# Altium PCB PCB_CONTROL.PcbDoc (part 9 of 15)
Units mil, origin at the board's own origin, x right, y up, seen from the top; angles counter-clockwise.
Board outline 7360.03 x 4773.15 mil, 2 copper layers (Top Layer, Bottom Layer); 73 components, 135 nets, 396 pads, 106 vias.
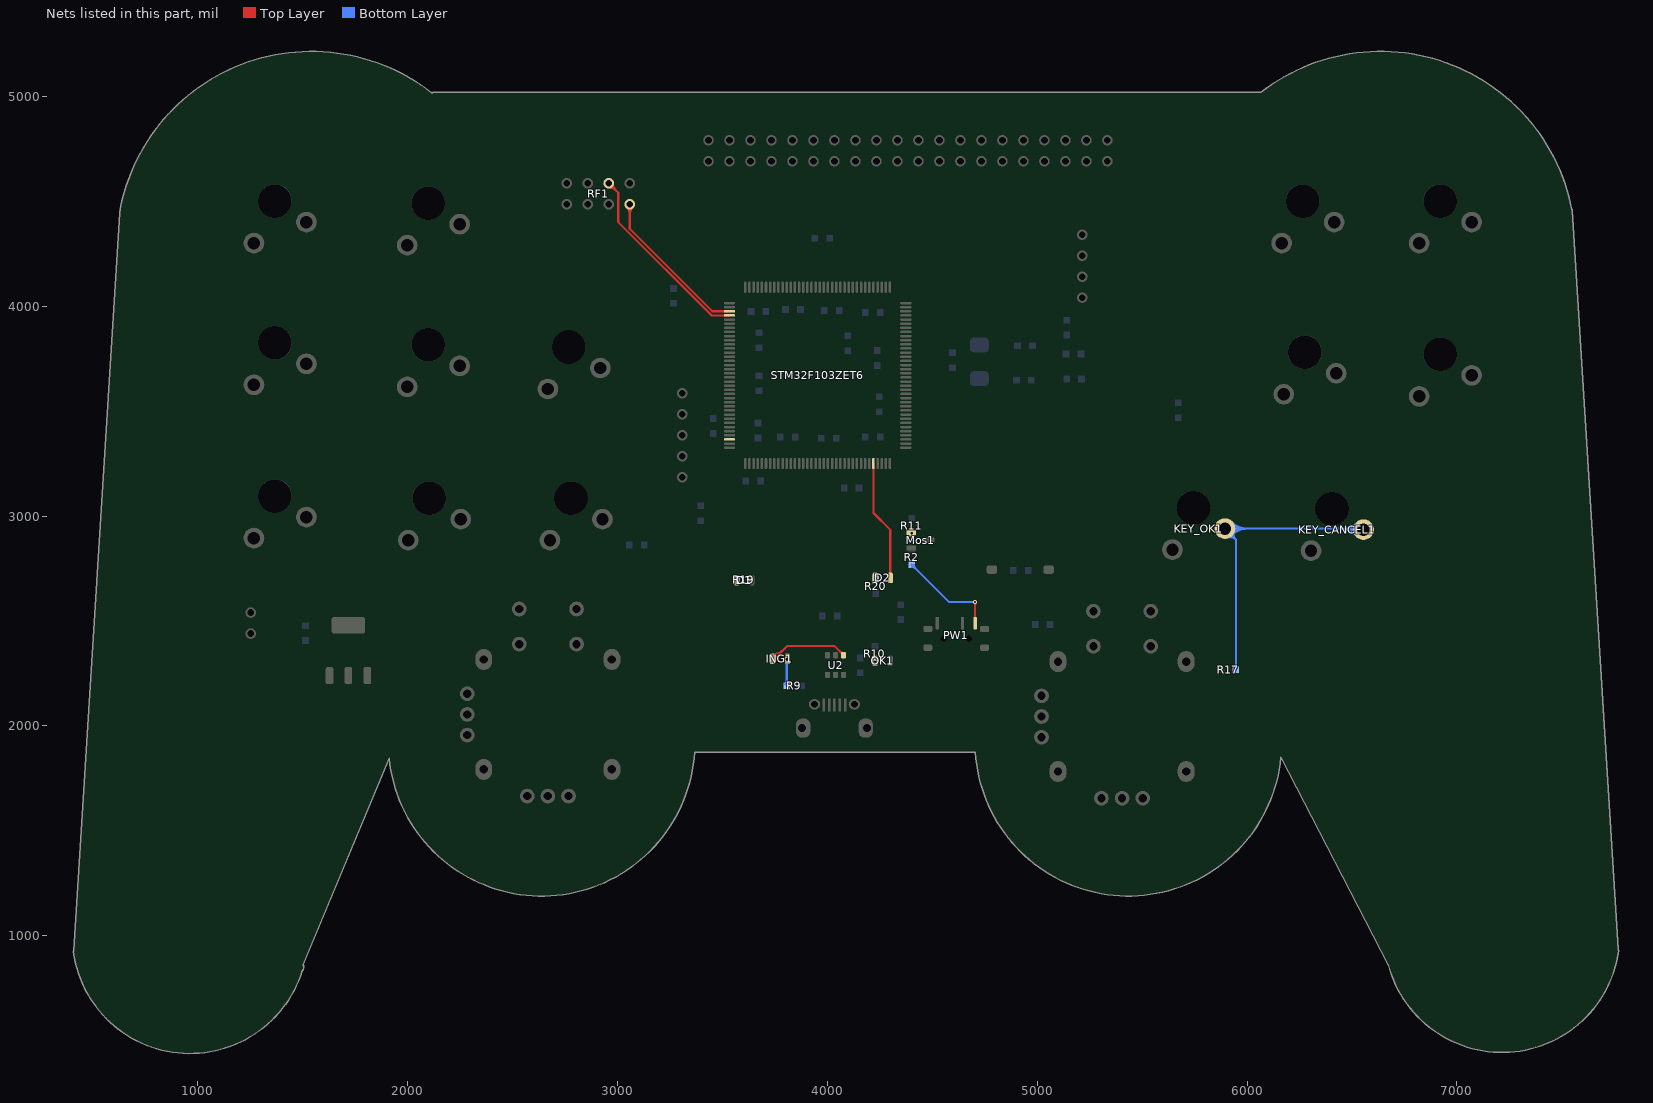
[diagram p9: the nets of this part, all layers, seen from the top]

## Via types
v1: diameter 20, hole 10, Top Layer to Bottom Layer, 104 vias
v2: diameter 30, hole 20, Top Layer to Bottom Layer, 2 vias

## Nets (pads, with @x,y where several pads share a name; then routed paths per layer and width w, separated by ;. In a path a pad name is that pad's centre, name@x,y a point inside that pad or via, vN(x,y) a via of type N, cw(c..) or ccw(c..) an arc to the next point about the centre after c; other vN are vias at no path point) (continued)
LED_SIG: D2.2 STM32F103ZET6.140 | length 1605.9
  Top Layer w10: STM32F103ZET6.140@4220.75,3250 4220.75,3014.25 4301,2934 D2.2@4301,2705 ; 4220.75,3193 STM32F103ZET6.140@4220.75,3229 ; 4220.75,3193 STM32F103ZET6.140@4220.75,3229 ; 4220.75,3193 STM32F103ZET6.140@4220.75,3229 ; D2.2@4296.05,2722.95 ccw(c4284.1,2734.9) 4301,2734.9 ; D2.2@4296.05,2722.95 ccw(c4284.1,2734.9) 4301,2734.9 ; D2.2@4296.05,2722.95 ccw(c4284.1,2734.9) 4301,2734.9 ; D2.2@4296.05,2722.95 ccw(c4284.1,2734.9) 4301,2734.9 ; D2.2@4296.05,2722.95 ccw(c4284.1,2734.9) 4301,2734.9 ; D2.2@4296.05,2722.95 ccw(c4284.1,2734.9) 4301,2734.9 ; D2.2@4296.05,2722.95 ccw(c4284.1,2734.9) 4301,2734.9 ; D2.2@4296.05,2722.95 ccw(c4284.1,2734.9) 4301,2734.9 ; D2.2@4296.05,2722.95 ccw(c4284.1,2734.9) 4301,2734.9 ; D2.2@4296.05,2722.95 ccw(c4284.1,2734.9) 4301,2734.9 ; D2.2@4297.06,2723.78 ccw(c4292.7,2730.17) 4300.42,2730.53 ; D2.2@4297.06,2723.78 ccw(c4292.7,2730.17) 4300.42,2730.53 ; D2.2@4297.06,2723.78 ccw(c4292.7,2730.17) 4300.42,2730.53 ; D2.2@4297.06,2723.78 ccw(c4292.7,2730.17) 4300.42,2730.53 ; D2.2@4297.06,2723.78 ccw(c4292.7,2730.17) 4300.42,2730.53 ; D2.2@4297.06,2723.78 ccw(c4292.7,2730.17) 4300.42,2730.53 ; D2.2@4297.06,2723.78 ccw(c4292.7,2730.17) 4300.42,2730.53 ; D2.2@4297.06,2723.78 ccw(c4292.7,2730.17) 4300.42,2730.53 ; D2.2@4297.06,2723.78 ccw(c4292.7,2730.17) 4300.42,2730.53 ; D2.2@4297.06,2723.78 ccw(c4292.7,2730.17) 4300.42,2730.53 ; D2.2@4297.06,2723.78 ccw(c4292.7,2730.17) 4300.42,2730.53 ; D2.2@4297.06,2723.78 ccw(c4292.7,2730.17) 4300.42,2730.53 ; D2.2@4297.06,2723.78 ccw(c4292.7,2730.17) 4300.42,2730.53 ; D2.2@4297.06,2723.78 ccw(c4292.7,2730.17) 4300.42,2730.53 ; D2.2@4297.06,2723.78 ccw(c4292.7,2730.17) 4300.42,2730.53 ; D2.2@4297.06,2723.78 ccw(c4292.7,2730.17) 4300.42,2730.53 ; D2.2@4297.6,2724.12 ccw(c4293.85,2730.88) 4301.58,2730.53 ; D2.2@4297.6,2724.12 ccw(c4293.85,2730.88) 4301.58,2730.53 ; D2.2@4297.6,2724.12 ccw(c4293.85,2730.88) 4301.58,2730.53 ; D2.2@4297.6,2724.12 ccw(c4293.85,2730.88) 4301.58,2730.53 ; D2.2@4297.6,2724.12 ccw(c4293.85,2730.88) 4301.58,2730.53 ; D2.2@4297.6,2724.12 ccw(c4293.85,2730.88) 4301.58,2730.53 ; D2.2@4297.6,2724.12 ccw(c4293.85,2730.88) 4301.58,2730.53 ; D2.2@4297.6,2724.12 ccw(c4293.85,2730.88) 4301.58,2730.53 ; D2.2@4297.6,2724.12 ccw(c4293.85,2730.88) 4301.58,2730.53 ; D2.2@4297.6,2724.12 ccw(c4293.85,2730.88) 4301.58,2730.53 ; D2.2@4297.6,2724.12 ccw(c4293.85,2730.88) 4301.58,2730.53 ; D2.2@4297.6,2724.12 ccw(c4293.85,2730.88) 4301.58,2730.53 ; D2.2@4297.6,2724.12 ccw(c4293.85,2730.88) 4301.58,2730.53 ; D2.2@4297.6,2724.12 ccw(c4293.85,2730.88) 4301.58,2730.53 ; D2.2@4297.6,2724.12 ccw(c4293.85,2730.88) 4301.58,2730.53 ; D2.2@4297.6,2724.12 ccw(c4293.85,2730.88) 4301.58,2730.53 ; 4300.42,2730.53 ccw(c4308.15,2730.88) D2.2@4304.4,2724.12 ; 4300.42,2730.53 ccw(c4308.15,2730.88) D2.2@4304.4,2724.12 ; 4300.42,2730.53 ccw(c4308.15,2730.88) D2.2@4304.4,2724.12 ; 4300.42,2730.53 ccw(c4308.15,2730.88) D2.2@4304.4,2724.12 ; 4300.42,2730.53 ccw(c4308.15,2730.88) D2.2@4304.4,2724.12 ; 4300.42,2730.53 ccw(c4308.15,2730.88) D2.2@4304.4,2724.12 ; 4300.42,2730.53 ccw(c4308.15,2730.88) D2.2@4304.4,2724.12 ; 4300.42,2730.53 ccw(c4308.15,2730.88) D2.2@4304.4,2724.12 ; 4300.42,2730.53 ccw(c4308.15,2730.88) D2.2@4304.4,2724.12 ; 4300.42,2730.53 ccw(c4308.15,2730.88) D2.2@4304.4,2724.12 ; 4300.42,2730.53 ccw(c4308.15,2730.88) D2.2@4304.4,2724.12 ; 4300.42,2730.53 ccw(c4308.15,2730.88) D2.2@4304.4,2724.12 ; 4300.42,2730.53 ccw(c4308.15,2730.88) D2.2@4304.4,2724.12 ; 4300.42,2730.53 ccw(c4308.15,2730.88) D2.2@4304.4,2724.12 ; 4300.42,2730.53 ccw(c4308.15,2730.88) D2.2@4304.4,2724.12 ; 4300.42,2730.53 ccw(c4308.15,2730.88) D2.2@4304.4,2724.12 ; 4300.42,2730.53 4294.2,2719.64 4300.42,2730.53 ; 4300.42,2730.53 4307.62,2720.26 4300.42,2730.53 ; 4300.42,2730.53 D2.2@4301,2718 ; 4300.42,2730.53 D2.2@4301,2718 ; D2.2@4301,2718 4301.58,2730.53 ; D2.2@4301,2718 4301.58,2730.53 ; 4301,2734.9 ccw(c4317.9,2734.9) D2.2@4305.95,2722.95 ; 4301,2734.9 ccw(c4317.9,2734.9) D2.2@4305.95,2722.95 ; 4301,2734.9 ccw(c4317.9,2734.9) D2.2@4305.95,2722.95 ; 4301,2734.9 ccw(c4317.9,2734.9) D2.2@4305.95,2722.95 ; 4301,2734.9 ccw(c4317.9,2734.9) D2.2@4305.95,2722.95 ; 4301,2734.9 ccw(c4317.9,2734.9) D2.2@4305.95,2722.95 ; 4301,2734.9 ccw(c4317.9,2734.9) D2.2@4305.95,2722.95 ; 4301,2734.9 ccw(c4317.9,2734.9) D2.2@4305.95,2722.95 ; 4301,2734.9 ccw(c4317.9,2734.9) D2.2@4305.95,2722.95 ; 4301,2734.9 ccw(c4317.9,2734.9) D2.2@4305.95,2722.95 ; 4301.58,2730.53 ccw(c4309.3,2730.17) D2.2@4304.94,2723.78 ; 4301.58,2730.53 ccw(c4309.3,2730.17) D2.2@4304.94,2723.78 ; 4301.58,2730.53 ccw(c4309.3,2730.17) D2.2@4304.94,2723.78 ; 4301.58,2730.53 ccw(c4309.3,2730.17) D2.2@4304.94,2723.78 ; 4301.58,2730.53 ccw(c4309.3,2730.17) D2.2@4304.94,2723.78 ; 4301.58,2730.53 ccw(c4309.3,2730.17) D2.2@4304.94,2723.78 ; 4301.58,2730.53 ccw(c4309.3,2730.17) D2.2@4304.94,2723.78 ; 4301.58,2730.53 ccw(c4309.3,2730.17) D2.2@4304.94,2723.78 ; 4301.58,2730.53 ccw(c4309.3,2730.17) D2.2@4304.94,2723.78 ; 4301.58,2730.53 ccw(c4309.3,2730.17) D2.2@4304.94,2723.78 ; 4301.58,2730.53 ccw(c4309.3,2730.17) D2.2@4304.94,2723.78 ; 4301.58,2730.53 ccw(c4309.3,2730.17) D2.2@4304.94,2723.78 ; 4301.58,2730.53 ccw(c4309.3,2730.17) D2.2@4304.94,2723.78 ; 4301.58,2730.53 ccw(c4309.3,2730.17) D2.2@4304.94,2723.78 ; 4301.58,2730.53 ccw(c4309.3,2730.17) D2.2@4304.94,2723.78 ; 4301.58,2730.53 ccw(c4309.3,2730.17) D2.2@4304.94,2723.78 ; 4301.58,2730.53 4294.38,2720.26 4301.58,2730.53 ; 4301.58,2730.53 4307.8,2719.64 4301.58,2730.53
MISO: RF1.7 STM32F103ZET6.75 | length 1058.3
  Top Layer w10: RF1.7@3060,4485 3060,4367.63 3452.51,3975.12 STM32F103ZET6.75@3535,3975.12 ; RF1.7@3045.86,4470.86 cw(c3011.72,4436.72) 3060,4436.72 ; RF1.7@3045.86,4470.86 cw(c3011.72,4436.72) 3060,4436.72 ; RF1.7@3045.86,4470.86 cw(c3011.72,4436.72) 3060,4436.72 ; RF1.7@3045.86,4470.86 cw(c3011.72,4436.72) 3060,4436.72 ; 3060,4436.72 cw(c3108.28,4436.72) RF1.7@3074.14,4470.86 ; 3060,4436.72 cw(c3108.28,4436.72) RF1.7@3074.14,4470.86 ; 3060,4436.72 cw(c3108.28,4436.72) RF1.7@3074.14,4470.86 ; 3060,4436.72 cw(c3108.28,4436.72) RF1.7@3074.14,4470.86
MOSI: RF1.6 STM32F103ZET6.76 | length 1685.5
  Top Layer w10: STM32F103ZET6.76@3535,3955.43 3449.57,3955.43 3005,4400 3005,4540 RF1.6@2960,4585 ; RF1.6@2960,4565 cw(c2960,4516.72) 2994.14,4550.86 ; RF1.6@2960,4565 cw(c2960,4516.72) 2994.14,4550.86 ; RF1.6@2960,4565 cw(c2960,4516.72) 2994.14,4550.86 ; RF1.6@2960,4565 cw(c2960,4516.72) 2994.14,4550.86 ; RF1.6@2960,4585 ccw(c2994.24,4592.01) 2985.2,4558.25 ; RF1.6@2960,4585 ccw(c2994.24,4592.01) 2985.2,4558.25 ; RF1.6@2960,4585 ccw(c2994.24,4592.01) 2985.2,4558.25 ; RF1.6@2960,4585 cw(c2952.99,4550.76) 2986.75,4559.8 ; RF1.6@2960,4585 cw(c2952.99,4550.76) 2986.75,4559.8 ; RF1.6@2960,4585 cw(c2952.99,4550.76) 2986.75,4559.8 ; RF1.6@2960,4585 cw(c2952.99,4550.76) 2986.75,4559.8 ; RF1.6@2960,4585 ccw(c2994.24,4592.01) 2985.2,4558.25 ; RF1.6@2960,4585 cw(c2952.99,4550.76) 2986.75,4559.8 ; RF1.6@2960,4585 cw(c2952.99,4550.76) 2986.75,4559.8 ; RF1.6@2960,4585 ccw(c2994.24,4592.01) 2985.2,4558.25 ; RF1.6@2960,4585 ccw(c2994.24,4592.01) 2985.2,4558.25 ; RF1.6@2980,4585 ccw(c3028.28,4585) 2994.14,4550.86 ; RF1.6@2980,4585 ccw(c3028.28,4585) 2994.14,4550.86 ; RF1.6@2980,4585 ccw(c3028.28,4585) 2994.14,4550.86 ; RF1.6@2980,4585 ccw(c3028.28,4585) 2994.14,4550.86
NC: STM32F103ZET6.106
NetD1_1: D1.1 R19.1
  other v1: 3568,2697
NetD2_1: D2.1 R20.1
  other v1: 4232,2702
NetING1_1: ING1.1 R9.1 | length 1262.3
  Bottom Layer w10: R9.1@3808,2192 v1(3808,2318) ; R9.1@3800.22,2199.78 ccw(c3781.44,2218.56) 3808,2218.56 ; R9.1@3800.22,2199.78 ccw(c3781.44,2218.56) 3808,2218.56 ; R9.1@3800.22,2199.78 ccw(c3781.44,2218.56) 3808,2218.56 ; R9.1@3800.22,2199.78 ccw(c3781.44,2218.56) 3808,2218.56 ; R9.1@3800.22,2199.78 ccw(c3781.44,2218.56) 3808,2218.56 ; R9.1@3800.22,2199.78 ccw(c3781.44,2218.56) 3808,2218.56 ; R9.1@3800.22,2199.78 ccw(c3781.44,2218.56) 3808,2218.56 ; R9.1@3800.22,2199.78 ccw(c3781.44,2218.56) 3808,2218.56 ; v1@3804.46,2314.46 cw(c3795.93,2305.93) 3808,2305.93 ; v1@3804.46,2314.46 cw(c3795.93,2305.93) 3808,2305.93 ; v1@3804.46,2314.46 cw(c3795.93,2305.93) 3808,2305.93 ; v1@3804.46,2314.46 cw(c3795.93,2305.93) 3808,2305.93 ; v1@3804.46,2314.46 cw(c3795.93,2305.93) 3808,2305.93 ; v1@3804.46,2314.46 cw(c3795.93,2305.93) 3808,2305.93 ; v1@3804.46,2314.46 cw(c3795.93,2305.93) 3808,2305.93 ; v1@3804.46,2314.46 cw(c3795.93,2305.93) 3808,2305.93 ; v1@3804.46,2314.46 cw(c3795.93,2305.93) 3808,2305.93 ; v1@3804.46,2314.46 cw(c3795.93,2305.93) 3808,2305.93 ; v1@3804.46,2314.46 cw(c3795.93,2305.93) 3808,2305.93 ; v1@3804.46,2314.46 cw(c3795.93,2305.93) 3808,2305.93 ; v1@3804.46,2314.46 cw(c3795.93,2305.93) 3808,2305.93 ; v1@3804.46,2314.46 cw(c3795.93,2305.93) 3808,2305.93 ; v1@3804.46,2314.46 cw(c3795.93,2305.93) 3808,2305.93 ; v1@3804.46,2314.46 cw(c3795.93,2305.93) 3808,2305.93 ; v1@3804.46,2314.46 cw(c3795.93,2305.93) 3808,2305.93 ; v1@3804.46,2314.46 cw(c3795.93,2305.93) 3808,2305.93 ; v1@3804.46,2314.46 cw(c3795.93,2305.93) 3808,2305.93 ; v1@3804.46,2314.46 cw(c3795.93,2305.93) 3808,2305.93 ; v1@3804.46,2314.46 cw(c3795.93,2305.93) 3808,2305.93 ; v1@3804.46,2314.46 cw(c3795.93,2305.93) 3808,2305.93 ; v1@3804.46,2314.46 cw(c3795.93,2305.93) 3808,2305.93 ; v1@3804.46,2314.46 cw(c3795.93,2305.93) 3808,2305.93 ; v1@3804.46,2314.46 cw(c3795.93,2305.93) 3808,2305.93 ; v1@3804.46,2314.46 cw(c3795.93,2305.93) 3808,2305.93 ; v1@3804.46,2314.46 cw(c3795.93,2305.93) 3808,2305.93 ; v1@3804.46,2314.46 cw(c3795.93,2305.93) 3808,2305.93 ; v1@3804.46,2314.46 cw(c3795.93,2305.93) 3808,2305.93 ; v1@3804.46,2314.46 cw(c3795.93,2305.93) 3808,2305.93 ; v1@3804.46,2314.46 cw(c3795.93,2305.93) 3808,2305.93 ; v1@3804.46,2314.46 cw(c3795.93,2305.93) 3808,2305.93 ; v1@3804.46,2314.46 cw(c3795.93,2305.93) 3808,2305.93 ; v1@3804.46,2314.46 cw(c3795.93,2305.93) 3808,2305.93 ; v1@3804.46,2314.46 cw(c3795.93,2305.93) 3808,2305.93 ; v1@3804.46,2314.46 cw(c3795.93,2305.93) 3808,2305.93 ; 3808,2218.56 ccw(c3834.56,2218.56) R9.1@3815.78,2199.78 ; 3808,2218.56 ccw(c3834.56,2218.56) R9.1@3815.78,2199.78 ; 3808,2218.56 ccw(c3834.56,2218.56) R9.1@3815.78,2199.78 ; 3808,2218.56 ccw(c3834.56,2218.56) R9.1@3815.78,2199.78 ; 3808,2218.56 ccw(c3834.56,2218.56) R9.1@3815.78,2199.78 ; 3808,2218.56 ccw(c3834.56,2218.56) R9.1@3815.78,2199.78 ; 3808,2218.56 ccw(c3834.56,2218.56) R9.1@3815.78,2199.78 ; 3808,2218.56 ccw(c3834.56,2218.56) R9.1@3815.78,2199.78 ; 3808,2278 v1(3808,2318) ; 3808,2278 v1(3808,2318) ; 3808,2278 v1(3808,2318) ; 3808,2305.93 cw(c3820.07,2305.93) v1@3811.54,2314.46 ; 3808,2305.93 cw(c3820.07,2305.93) v1@3811.54,2314.46 ; 3808,2305.93 cw(c3820.07,2305.93) v1@3811.54,2314.46 ; 3808,2305.93 cw(c3820.07,2305.93) v1@3811.54,2314.46 ; 3808,2305.93 cw(c3820.07,2305.93) v1@3811.54,2314.46 ; 3808,2305.93 cw(c3820.07,2305.93) v1@3811.54,2314.46 ; 3808,2305.93 cw(c3820.07,2305.93) v1@3811.54,2314.46 ; 3808,2305.93 cw(c3820.07,2305.93) v1@3811.54,2314.46 ; 3808,2305.93 cw(c3820.07,2305.93) v1@3811.54,2314.46 ; 3808,2305.93 cw(c3820.07,2305.93) v1@3811.54,2314.46 ; 3808,2305.93 cw(c3820.07,2305.93) v1@3811.54,2314.46 ; 3808,2305.93 cw(c3820.07,2305.93) v1@3811.54,2314.46 ; 3808,2305.93 cw(c3820.07,2305.93) v1@3811.54,2314.46 ; 3808,2305.93 cw(c3820.07,2305.93) v1@3811.54,2314.46 ; 3808,2305.93 cw(c3820.07,2305.93) v1@3811.54,2314.46 ; 3808,2305.93 cw(c3820.07,2305.93) v1@3811.54,2314.46 ; 3808,2305.93 cw(c3820.07,2305.93) v1@3811.54,2314.46 ; 3808,2305.93 cw(c3820.07,2305.93) v1@3811.54,2314.46 ; 3808,2305.93 cw(c3820.07,2305.93) v1@3811.54,2314.46 ; 3808,2305.93 cw(c3820.07,2305.93) v1@3811.54,2314.46 ; 3808,2305.93 cw(c3820.07,2305.93) v1@3811.54,2314.46 ; 3808,2305.93 cw(c3820.07,2305.93) v1@3811.54,2314.46 ; 3808,2305.93 cw(c3820.07,2305.93) v1@3811.54,2314.46 ; 3808,2305.93 cw(c3820.07,2305.93) v1@3811.54,2314.46 ; 3808,2305.93 cw(c3820.07,2305.93) v1@3811.54,2314.46 ; 3808,2305.93 cw(c3820.07,2305.93) v1@3811.54,2314.46 ; 3808,2305.93 cw(c3820.07,2305.93) v1@3811.54,2314.46 ; 3808,2305.93 cw(c3820.07,2305.93) v1@3811.54,2314.46 ; 3808,2305.93 cw(c3820.07,2305.93) v1@3811.54,2314.46 ; 3808,2305.93 cw(c3820.07,2305.93) v1@3811.54,2314.46 ; 3808,2305.93 cw(c3820.07,2305.93) v1@3811.54,2314.46 ; 3808,2305.93 cw(c3820.07,2305.93) v1@3811.54,2314.46 ; 3808,2305.93 cw(c3820.07,2305.93) v1@3811.54,2314.46 ; 3808,2305.93 cw(c3820.07,2305.93) v1@3811.54,2314.46 ; 3808,2305.93 cw(c3820.07,2305.93) v1@3811.54,2314.46 ; 3808,2305.93 cw(c3820.07,2305.93) v1@3811.54,2314.46
NetING1_2: ING1.2 U2.1 | length 4391.6
  Top Layer w10: ING1.2@3739,2310 3809,2380 4036.04,2380 4078,2338.04 U2.1@4078,2337 ; ING1.2@3739,2320 ccw(c3739,2344.14) 3756.07,2327.07 ; ING1.2@3739,2320 ccw(c3739,2344.14) 3756.07,2327.07 ; ING1.2@3739,2320 ccw(c3739,2344.14) 3756.07,2327.07 ; ING1.2@3739,2320 ccw(c3739,2344.14) 3756.07,2327.07 ; ING1.2@3739,2320 ccw(c3739,2344.14) 3756.07,2327.07 ; ING1.2@3739,2320 ccw(c3739,2344.14) 3756.07,2327.07 ; ING1.2@3739,2320 ccw(c3739,2344.14) 3756.07,2327.07 ; ING1.2@3739,2320 ccw(c3739,2344.14) 3756.07,2327.07 ; ING1.2@3739,2330 ccw(c3739,2378.28) 3773.14,2344.14 ; ING1.2@3739,2330 ccw(c3739,2378.28) 3773.14,2344.14 ; ING1.2@3739,2330 ccw(c3739,2378.28) 3773.14,2344.14 ; ING1.2@3739,2330 ccw(c3739,2378.28) 3773.14,2344.14 ; ING1.2@3739,2330 ccw(c3739,2378.28) 3773.14,2344.14 ; ING1.2@3739,2330 ccw(c3739,2378.28) 3773.14,2344.14 ; ING1.2@3739,2330 ccw(c3739,2378.28) 3773.14,2344.14 ; ING1.2@3739,2330 ccw(c3739,2378.28) 3773.14,2344.14 ; ING1.2@3739,2340 ccw(c3739,2412.43) 3790.21,2361.21 ; ING1.2@3739,2340 ccw(c3739,2412.43) 3790.21,2361.21 ; ING1.2@3739,2340 ccw(c3739,2412.43) 3790.21,2361.21 ; ING1.2@3739,2340 ccw(c3739,2412.43) 3790.21,2361.21 ; ING1.2@3739,2340 ccw(c3739,2412.43) 3790.21,2361.21 ; ING1.2@3739,2340 ccw(c3739,2412.43) 3790.21,2361.21 ; ING1.2@3739,2340 ccw(c3739,2412.43) 3790.21,2361.21 ; ING1.2@3739,2340 ccw(c3739,2412.43) 3790.21,2361.21 ; ING1.2@3741.15,2339.66 ccw(c3746.77,2357.07) 3759.7,2344.13 ; ING1.2@3741.15,2339.66 ccw(c3746.77,2357.07) 3759.7,2344.13 ; ING1.2@3741.15,2339.66 ccw(c3746.77,2357.07) 3759.7,2344.13 ; ING1.2@3741.15,2339.66 ccw(c3746.77,2357.07) 3759.7,2344.13 ; ING1.2@3741.15,2339.66 ccw(c3746.77,2357.07) 3759.7,2344.13 ; ING1.2@3741.15,2339.66 ccw(c3746.77,2357.07) 3759.7,2344.13 ; ING1.2@3741.15,2339.66 ccw(c3746.77,2357.07) 3759.7,2344.13 ; ING1.2@3741.15,2339.66 ccw(c3746.77,2357.07) 3759.7,2344.13 ; ING1.2@3741.15,2339.66 ccw(c3746.77,2357.07) 3759.7,2344.13 ; ING1.2@3741.15,2339.66 ccw(c3746.77,2357.07) 3759.7,2344.13 ; ING1.2@3741.15,2339.66 ccw(c3746.77,2357.07) 3759.7,2344.13 ; ING1.2@3741.15,2339.66 ccw(c3746.77,2357.07) 3759.7,2344.13 ; ING1.2@3741.15,2339.66 ccw(c3746.77,2357.07) 3759.7,2344.13 ; ING1.2@3741.15,2339.66 ccw(c3746.77,2357.07) 3759.7,2344.13 ; ING1.2@3741.15,2339.66 ccw(c3746.77,2357.07) 3759.7,2344.13 ; ING1.2@3741.15,2339.66 ccw(c3746.77,2357.07) 3759.7,2344.13 ; ING1.2@3741.15,2339.66 ccw(c3746.77,2357.07) 3759.7,2344.13 ; ING1.2@3741.15,2339.66 ccw(c3746.77,2357.07) 3759.7,2344.13 ; ING1.2@3741.15,2339.66 ccw(c3746.77,2357.07) 3759.7,2344.13 ; ING1.2@3741.15,2339.66 ccw(c3746.77,2357.07) 3759.7,2344.13 ; ING1.2@3741.15,2339.66 ccw(c3746.77,2357.07) 3759.7,2344.13 ; ING1.2@3741.15,2339.66 ccw(c3746.77,2357.07) 3759.7,2344.13 ; ING1.2@3741.15,2339.66 ccw(c3746.77,2357.07) 3759.7,2344.13 ; ING1.2@3741.15,2339.66 ccw(c3746.77,2357.07) 3759.7,2344.13 ; ING1.2@3741.15,2339.66 ccw(c3746.77,2357.07) 3759.7,2344.13 ; ING1.2@3741.15,2339.66 ccw(c3746.77,2357.07) 3759.7,2344.13 ; ING1.2@3741.15,2339.66 ccw(c3746.77,2357.07) 3759.7,2344.13 ; ING1.2@3741.15,2339.66 ccw(c3746.77,2357.07) 3759.7,2344.13 ; ING1.2@3741.15,2339.66 ccw(c3746.77,2357.07) 3759.7,2344.13 ; ING1.2@3741.15,2339.66 ccw(c3746.77,2357.07) 3759.7,2344.13 ; ING1.2@3741.15,2339.66 ccw(c3746.77,2357.07) 3759.7,2344.13 ; ING1.2@3741.15,2339.66 ccw(c3746.77,2357.07) 3759.7,2344.13 ; ING1.2@3741.15,2339.66 ccw(c3746.77,2357.07) 3759.7,2344.13 ; ING1.2@3741.15,2339.66 ccw(c3746.77,2357.07) 3759.7,2344.13 ; ING1.2@3741.15,2339.66 ccw(c3746.77,2357.07) 3759.7,2344.13 ; ING1.2@3741.15,2339.66 ccw(c3746.77,2357.07) 3759.7,2344.13 ; ING1.2@3741.15,2339.66 ccw(c3746.77,2357.07) 3759.7,2344.13 ; ING1.2@3741.15,2339.66 ccw(c3746.77,2357.07) 3759.7,2344.13 ; ING1.2@3741.15,2339.66 ccw(c3746.77,2357.07) 3759.7,2344.13 ; ING1.2@3741.15,2339.66 ccw(c3746.77,2357.07) 3759.7,2344.13 ; ING1.2@3741.15,2339.66 ccw(c3746.77,2357.07) 3759.7,2344.13 ; ING1.2@3741.15,2339.66 ccw(c3746.77,2357.07) 3759.7,2344.13 ; ING1.2@3741.15,2339.66 ccw(c3746.77,2357.07) 3759.7,2344.13 ; ING1.2@3741.15,2339.66 ccw(c3746.77,2357.07) 3759.7,2344.13 ; ING1.2@3741.15,2339.66 ccw(c3746.77,2357.07) 3759.7,2344.13 ; ING1.2@3741.15,2339.66 ccw(c3746.77,2357.07) 3759.7,2344.13 ; ING1.2@3741.15,2339.66 ccw(c3746.77,2357.07) 3759.7,2344.13 ; ING1.2@3741.15,2339.66 ccw(c3746.77,2357.07) 3759.7,2344.13 ; ING1.2@3741.15,2339.66 ccw(c3746.77,2357.07) 3759.7,2344.13 ; ING1.2@3741.15,2339.66 ccw(c3746.77,2357.07) 3759.7,2344.13 ; ING1.2@3741.15,2339.66 ccw(c3746.77,2357.07) 3759.7,2344.13 ; ING1.2@3741.15,2339.66 ccw(c3746.77,2357.07) 3759.7,2344.13 ; ING1.2@3741.15,2339.66 ccw(c3746.77,2357.07) 3759.7,2344.13 ; ING1.2@3741.15,2339.66 ccw(c3746.77,2357.07) 3759.7,2344.13 ; ING1.2@3741.15,2339.66 ccw(c3746.77,2357.07) 3759.7,2344.13 ; ING1.2@3741.15,2339.66 ccw(c3746.77,2357.07) 3759.7,2344.13 ; ING1.2@3743.46,2338.4 ccw(c3754.01,2351.17) 3758.29,2335.17 ; ING1.2@3743.46,2338.4 ccw(c3754.01,2351.17) 3758.29,2335.17 ; ING1.2@3743.46,2338.4 ccw(c3754.01,2351.17) 3758.29,2335.17 ; ING1.2@3743.46,2338.4 ccw(c3754.01,2351.17) 3758.29,2335.17 ; ING1.2@3743.46,2338.4 ccw(c3754.01,2351.17) 3758.29,2335.17 ; ING1.2@3743.46,2338.4 ccw(c3754.01,2351.17) 3758.29,2335.17 ; ING1.2@3743.46,2338.4 ccw(c3754.01,2351.17) 3758.29,2335.17 ; ING1.2@3743.46,2338.4 ccw(c3754.01,2351.17) 3758.29,2335.17 ; ING1.2@3743.46,2338.4 ccw(c3754.01,2351.17) 3758.29,2335.17 ; ING1.2@3743.46,2338.4 ccw(c3754.01,2351.17) 3758.29,2335.17 ; ING1.2@3743.46,2338.4 ccw(c3754.01,2351.17) 3758.29,2335.17 ; ING1.2@3743.46,2338.4 ccw(c3754.01,2351.17) 3758.29,2335.17 ; ING1.2@3743.46,2338.4 ccw(c3754.01,2351.17) 3758.29,2335.17 ; ING1.2@3743.46,2338.4 ccw(c3754.01,2351.17) 3758.29,2335.17 ; ING1.2@3743.46,2338.4 ccw(c3754.01,2351.17) 3758.29,2335.17 ; ING1.2@3743.46,2338.4 ccw(c3754.01,2351.17) 3758.29,2335.17 ; ING1.2@3743.46,2338.4 ccw(c3754.01,2351.17) 3758.29,2335.17 ; ING1.2@3743.46,2338.4 ccw(c3754.01,2351.17) 3758.29,2335.17 ; ING1.2@3743.46,2338.4 ccw(c3754.01,2351.17) 3758.29,2335.17 ; ING1.2@3743.46,2338.4 ccw(c3754.01,2351.17) 3758.29,2335.17 ; ING1.2@3743.46,2338.4 ccw(c3754.01,2351.17) 3758.29,2335.17 ; ING1.2@3743.46,2338.4 ccw(c3754.01,2351.17) 3758.29,2335.17 ; ING1.2@3743.46,2338.4 ccw(c3754.01,2351.17) 3758.29,2335.17 ; ING1.2@3743.46,2338.4 ccw(c3754.01,2351.17) 3758.29,2335.17 ; ING1.2@3743.46,2338.4 ccw(c3754.01,2351.17) 3758.29,2335.17 ; ING1.2@3743.46,2338.4 ccw(c3754.01,2351.17) 3758.29,2335.17 ; ING1.2@3743.46,2338.4 ccw(c3754.01,2351.17) 3758.29,2335.17 ; ING1.2@3743.46,2338.4 ccw(c3754.01,2351.17) 3758.29,2335.17 ; ING1.2@3743.82,2325.08 ccw(c3749.09,2330.63) 3751.07,2323.23 ; ING1.2@3743.82,2325.08 ccw(c3749.09,2330.63) 3751.07,2323.23 ; ING1.2@3743.82,2325.08 ccw(c3749.09,2330.63) 3751.07,2323.23 ; ING1.2@3743.82,2325.08 ccw(c3749.09,2330.63) 3751.07,2323.23 ; ING1.2@3743.82,2325.08 ccw(c3749.09,2330.63) 3751.07,2323.23 ; ING1.2@3743.82,2325.08 ccw(c3749.09,2330.63) 3751.07,2323.23 ; ING1.2@3743.82,2325.08 ccw(c3749.09,2330.63) 3751.07,2323.23 ; ING1.2@3743.82,2325.08 ccw(c3749.09,2330.63) 3751.07,2323.23 ; ING1.2@3743.82,2325.08 ccw(c3749.09,2330.63) 3751.07,2323.23 ; ING1.2@3743.82,2325.08 ccw(c3749.09,2330.63) 3751.07,2323.23 ; ING1.2@3743.82,2325.08 ccw(c3749.09,2330.63) 3751.07,2323.23 ; ING1.2@3743.82,2325.08 ccw(c3749.09,2330.63) 3751.07,2323.23 ; ING1.2@3743.82,2325.08 ccw(c3749.09,2330.63) 3751.07,2323.23 ; ING1.2@3743.82,2325.08 ccw(c3749.09,2330.63) 3751.07,2323.23 ; ING1.2@3743.82,2325.08 ccw(c3749.09,2330.63) 3751.07,2323.23 ; ING1.2@3743.82,2325.08 ccw(c3749.09,2330.63) 3751.07,2323.23 ; ING1.2@3743.82,2325.08 ccw(c3749.09,2330.63) 3751.07,2323.23 ; ING1.2@3743.82,2325.08 ccw(c3749.09,2330.63) 3751.07,2323.23 ; ING1.2@3743.82,2325.08 ccw(c3749.09,2330.63) 3751.07,2323.23 ; ING1.2@3743.82,2325.08 ccw(c3749.09,2330.63) 3751.07,2323.23 ; ING1.2@3743.82,2325.08 ccw(c3749.09,2330.63) 3751.07,2323.23 ; ING1.2@3743.82,2325.08 ccw(c3749.09,2330.63) 3751.07,2323.23 ; ING1.2@3743.82,2325.08 ccw(c3749.09,2330.63) 3751.07,2323.23 ; ING1.2@3743.82,2325.08 ccw(c3749.09,2330.63) 3751.07,2323.23 ; ING1.2@3743.82,2325.08 ccw(c3749.09,2330.63) 3751.07,2323.23 ; ING1.2@3743.82,2325.08 ccw(c3749.09,2330.63) 3751.07,2323.23 ; ING1.2@3743.82,2325.08 ccw(c3749.09,2330.63) 3751.07,2323.23 ; ING1.2@3743.82,2325.08 ccw(c3749.09,2330.63) 3751.07,2323.23 ; ING1.2@3745.06,2329.5 cw(c3779.69,2309.51) 3769.34,2348.13 ; ING1.2@3745.06,2329.5 cw(c3779.69,2309.51) 3769.34,2348.13 ; ING1.2@3745.06,2329.5 cw(c3779.69,2309.51) 3769.34,2348.13 ; ING1.2@3745.06,2329.5 cw(c3779.69,2309.51) 3769.34,2348.13 ; ING1.2@3745.06,2329.5 cw(c3779.69,2309.51) 3769.34,2348.13 ; ING1.2@3745.06,2329.5 cw(c3779.69,2309.51) 3769.34,2348.13 ; ING1.2@3745.06,2329.5 cw(c3779.69,2309.51) 3769.34,2348.13 ; ING1.2@3745.06,2329.5 cw(c3779.69,2309.51) 3769.34,2348.13 ; ING1.2@3745.06,2329.5 cw(c3779.69,2309.51) 3769.34,2348.13 ; ING1.2@3745.06,2329.5 cw(c3779.69,2309.51) 3769.34,2348.13 ; ING1.2@3745.06,2329.5 cw(c3779.69,2309.51) 3769.34,2348.13 ; ING1.2@3745.06,2329.5 cw(c3779.69,2309.51) 3769.34,2348.13 ; ING1.2@3745.06,2329.5 cw(c3779.69,2309.51) 3769.34,2348.13 ; ING1.2@3745.06,2329.5 cw(c3779.69,2309.51) 3769.34,2348.13 ; ING1.2@3745.06,2329.5 cw(c3779.69,2309.51) 3769.34,2348.13 ; ING1.2@3745.06,2329.5 cw(c3779.69,2309.51) 3769.34,2348.13 ; ING1.2@3745.06,2329.5 cw(c3779.69,2309.51) 3769.34,2348.13 ; ING1.2@3745.06,2329.5 cw(c3779.69,2309.51) 3769.34,2348.13 ; ING1.2@3745.06,2329.5 cw(c3779.69,2309.51) 3769.34,2348.13 ; ING1.2@3745.06,2329.5 cw(c3779.69,2309.51) 3769.34,2348.13 ; ING1.2@3745.06,2329.5 cw(c3779.69,2309.51) 3769.34,2348.13 ; ING1.2@3745.06,2329.5 cw(c3779.69,2309.51) 3769.34,2348.13 ; ING1.2@3745.06,2329.5 cw(c3779.69,2309.51) 3769.34,2348.13 ; ING1.2@3745.06,2329.5 cw(c3779.69,2309.51) 3769.34,2348.13 ; ING1.2@3745.06,2329.5 cw(c3779.69,2309.51) 3769.34,2348.13 ; ING1.2@3745.06,2329.5 cw(c3779.69,2309.51) 3769.34,2348.13 ; ING1.2@3745.06,2329.5 cw(c3779.69,2309.51) 3769.34,2348.13 ; ING1.2@3745.06,2329.5 cw(c3779.69,2309.51) 3769.34,2348.13 ; ING1.2@3745.71,2318.01 cw(c3753.05,2315.84) 3751.07,2323.23 ; ING1.2@3745.71,2318.01 cw(c3753.05,2315.84) 3751.07,2323.23 ; ING1.2@3745.71,2318.01 cw(c3753.05,2315.84) 3751.07,2323.23 ; ING1.2@3745.71,2318.01 cw(c3753.05,2315.84) 3751.07,2323.23 ; ING1.2@3745.71,2318.01 cw(c3753.05,2315.84) 3751.07,2323.23 ; ING1.2@3745.71,2318.01 cw(c3753.05,2315.84) 3751.07,2323.23 ; ING1.2@3745.71,2318.01 cw(c3753.05,2315.84) 3751.07,2323.23 ; ING1.2@3745.71,2318.01 cw(c3753.05,2315.84) 3751.07,2323.23 ; ING1.2@3745.71,2318.01 cw(c3753.05,2315.84) 3751.07,2323.23 ; ING1.2@3745.71,2318.01 cw(c3753.05,2315.84) 3751.07,2323.23 ; ING1.2@3745.71,2318.01 cw(c3753.05,2315.84) 3751.07,2323.23 ; ING1.2@3745.71,2318.01 cw(c3753.05,2315.84) 3751.07,2323.23 ; ING1.2@3745.71,2318.01 cw(c3753.05,2315.84) 3751.07,2323.23 ; ING1.2@3745.71,2318.01 cw(c3753.05,2315.84) 3751.07,2323.23 ; ING1.2@3745.71,2318.01 cw(c3753.05,2315.84) 3751.07,2323.23 ; ING1.2@3745.71,2318.01 cw(c3753.05,2315.84) 3751.07,2323.23 ; ING1.2@3745.71,2318.01 cw(c3753.05,2315.84) 3751.07,2323.23 ; ING1.2@3745.71,2318.01 cw(c3753.05,2315.84) 3751.07,2323.23 ; ING1.2@3745.71,2318.01 cw(c3753.05,2315.84) 3751.07,2323.23 ; ING1.2@3745.71,2318.01 cw(c3753.05,2315.84) 3751.07,2323.23 ; ING1.2@3745.71,2318.01 cw(c3753.05,2315.84) 3751.07,2323.23 ; ING1.2@3745.71,2318.01 cw(c3753.05,2315.84) 3751.07,2323.23 ; ING1.2@3745.71,2318.01 cw(c3753.05,2315.84) 3751.07,2323.23 ; ING1.2@3745.71,2318.01 cw(c3753.05,2315.84) 3751.07,2323.23 ; ING1.2@3745.71,2318.01 cw(c3753.05,2315.84) 3751.07,2323.23 ; ING1.2@3745.71,2318.01 cw(c3753.05,2315.84) 3751.07,2323.23 ; ING1.2@3745.71,2318.01 cw(c3753.05,2315.84) 3751.07,2323.23 ; ING1.2@3745.71,2318.01 cw(c3753.05,2315.84) 3751.07,2323.23 ; 4062.71,2353.33 ccw(c4078,2368.63) U2.1@4078,2347 ; 4062.71,2353.33 ccw(c4078,2368.63) U2.1@4078,2347 ; 4062.71,2353.33 ccw(c4078,2368.63) U2.1@4078,2347 ; 4062.71,2353.33 ccw(c4078,2368.63) U2.1@4078,2347 ; 4062.71,2353.33 ccw(c4078,2368.63) U2.1@4078,2347 ; 4062.71,2353.33 ccw(c4078,2368.63) U2.1@4078,2347 ; 4062.71,2353.33 ccw(c4078,2368.63) U2.1@4078,2347 ; 4062.71,2353.33 ccw(c4078,2368.63) U2.1@4078,2347 ; U2.1@4067.44,2348.61 cw(c4058.83,2340) U2.1@4071,2340 ; U2.1@4067.44,2348.61 cw(c4058.83,2340) U2.1@4071,2340 ; U2.1@4067.44,2348.61 cw(c4058.83,2340) U2.1@4071,2340 ; U2.1@4067.44,2348.61 cw(c4058.83,2340) U2.1@4071,2340 ; U2.1@4067.44,2348.61 cw(c4058.83,2340) U2.1@4071,2340 ; U2.1@4067.44,2348.61 cw(c4058.83,2340) U2.1@4071,2340 ; U2.1@4067.44,2348.61 cw(c4058.83,2340) U2.1@4071,2340 ; U2.1@4067.44,2348.61 cw(c4058.83,2340) U2.1@4071,2340
NetKEY_CANCEL1_1: KEY_CANCEL1.1 KEY_OK1.1 R17.1 | length 8856.7
  Bottom Layer w10: R17.1@5947,2268 5947,2888 ; KEY_CANCEL1.1@6555,2935 6550,2940 KEY_OK1.1@5895,2940 5947,2888 ; KEY_OK1.1@5905.02,2907.29 cw(c5913.87,2878.4) 5935.24,2899.76 ; KEY_OK1.1@5905.02,2907.29 cw(c5913.87,2878.4) 5935.24,2899.76 ; KEY_OK1.1@5905.02,2907.29 cw(c5913.87,2878.4) 5935.24,2899.76 ; KEY_OK1.1@5905.02,2907.29 cw(c5913.87,2878.4) 5935.24,2899.76 ; KEY_OK1.1@5905.02,2907.29 cw(c5913.87,2878.4) 5935.24,2899.76 ; KEY_OK1.1@5905.02,2907.29 cw(c5913.87,2878.4) 5935.24,2899.76 ; KEY_OK1.1@5905.02,2907.29 cw(c5913.87,2878.4) 5935.24,2899.76 ; KEY_OK1.1@5905.02,2907.29 cw(c5913.87,2878.4) 5935.24,2899.76 ; KEY_OK1.1@5907.95,2897.73 cw(c5919.39,2860.39) 5947,2888 ; KEY_OK1.1@5907.95,2897.73 cw(c5919.39,2860.39) 5947,2888 ; KEY_OK1.1@5907.95,2897.73 cw(c5919.39,2860.39) 5947,2888 ; KEY_OK1.1@5907.95,2897.73 cw(c5919.39,2860.39) 5947,2888 ; KEY_OK1.1@5907.95,2897.73 cw(c5919.39,2860.39) 5947,2888 ; KEY_OK1.1@5907.95,2897.73 cw(c5919.39,2860.39) 5947,2888 ; KEY_OK1.1@5907.95,2897.73 cw(c5919.39,2860.39) 5947,2888 ; KEY_OK1.1@5907.95,2897.73 cw(c5919.39,2860.39) 5947,2888 ; KEY_OK1.1@5912.12,2922.88 cw(c5953.45,2881.55) 5953.45,2940 ; KEY_OK1.1@5912.12,2922.88 cw(c5953.45,2881.55) 5953.45,2940 ; KEY_OK1.1@5912.12,2922.88 cw(c5953.45,2881.55) 5953.45,2940 ; KEY_OK1.1@5912.12,2922.88 cw(c5953.45,2881.55) 5953.45,2940 ; KEY_OK1.1@5912.12,2922.88 cw(c5953.45,2881.55) 5953.45,2940 ; KEY_OK1.1@5912.12,2922.88 cw(c5953.45,2881.55) 5953.45,2940 ; KEY_OK1.1@5912.12,2922.88 cw(c5953.45,2881.55) 5953.45,2940 ; KEY_OK1.1@5912.12,2922.88 cw(c5953.45,2881.55) 5953.45,2940 ; KEY_OK1.1@5912.12,2957.12 ccw(c5953.45,2998.45) 5953.45,2940 ; KEY_OK1.1@5912.12,2957.12 ccw(c5953.45,2998.45) 5953.45,2940 ; KEY_OK1.1@5912.12,2957.12 ccw(c5953.45,2998.45) 5953.45,2940 ; KEY_OK1.1@5912.12,2957.12 ccw(c5953.45,2998.45) 5953.45,2940 ; KEY_OK1.1@5912.12,2957.12 ccw(c5953.45,2998.45) 5953.45,2940 ; KEY_OK1.1@5912.12,2957.12 ccw(c5953.45,2998.45) 5953.45,2940 ; KEY_OK1.1@5912.12,2957.12 ccw(c5953.45,2998.45) 5953.45,2940 ; KEY_OK1.1@5912.12,2957.12 ccw(c5953.45,2998.45) 5953.45,2940 ; KEY_OK1.1@5919.19,2915.81 cw(c5977.6,2857.4) 5977.6,2940 ; KEY_OK1.1@5919.19,2915.81 cw(c5977.6,2857.4) 5977.6,2940 ; KEY_OK1.1@5919.19,2915.81 cw(c5977.6,2857.4) 5977.6,2940 ; KEY_OK1.1@5919.19,2915.81 cw(c5977.6,2857.4) 5977.6,2940 ; KEY_OK1.1@5919.19,2915.81 cw(c5977.6,2857.4) 5977.6,2940 ; KEY_OK1.1@5919.19,2915.81 cw(c5977.6,2857.4) 5977.6,2940 ; KEY_OK1.1@5919.19,2915.81 cw(c5977.6,2857.4) 5977.6,2940 ; KEY_OK1.1@5919.19,2915.81 cw(c5977.6,2857.4) 5977.6,2940 ; KEY_OK1.1@5919.19,2964.19 ccw(c5977.6,3022.6) 5977.6,2940 ; KEY_OK1.1@5919.19,2964.19 ccw(c5977.6,3022.6) 5977.6,2940 ; KEY_OK1.1@5919.19,2964.19 ccw(c5977.6,3022.6) 5977.6,2940 ; KEY_OK1.1@5919.19,2964.19 ccw(c5977.6,3022.6) 5977.6,2940 ; KEY_OK1.1@5919.19,2964.19 ccw(c5977.6,3022.6) 5977.6,2940 ; KEY_OK1.1@5919.19,2964.19 ccw(c5977.6,3022.6) 5977.6,2940 ; KEY_OK1.1@5919.19,2964.19 ccw(c5977.6,3022.6) 5977.6,2940 ; KEY_OK1.1@5919.19,2964.19 ccw(c5977.6,3022.6) 5977.6,2940 ; KEY_OK1.1@5926.26,2908.74 cw(c6001.74,2833.26) 6001.74,2940 ; KEY_OK1.1@5926.26,2908.74 cw(c6001.74,2833.26) 6001.74,2940 ; KEY_OK1.1@5926.26,2908.74 cw(c6001.74,2833.26) 6001.74,2940 ; KEY_OK1.1@5926.26,2908.74 cw(c6001.74,2833.26) 6001.74,2940 ; KEY_OK1.1@5926.26,2908.74 cw(c6001.74,2833.26) 6001.74,2940 ; KEY_OK1.1@5926.26,2908.74 cw(c6001.74,2833.26) 6001.74,2940 ; KEY_OK1.1@5926.26,2908.74 cw(c6001.74,2833.26) 6001.74,2940 ; KEY_OK1.1@5926.26,2908.74 cw(c6001.74,2833.26) 6001.74,2940 ; KEY_OK1.1@5926.26,2971.26 ccw(c6001.74,3046.74) 6001.74,2940 ; KEY_OK1.1@5926.26,2971.26 ccw(c6001.74,3046.74) 6001.74,2940 ; KEY_OK1.1@5926.26,2971.26 ccw(c6001.74,3046.74) 6001.74,2940 ; KEY_OK1.1@5926.26,2971.26 ccw(c6001.74,3046.74) 6001.74,2940 ; KEY_OK1.1@5926.26,2971.26 ccw(c6001.74,3046.74) 6001.74,2940 ; KEY_OK1.1@5926.26,2971.26 ccw(c6001.74,3046.74) 6001.74,2940 ; KEY_OK1.1@5926.26,2971.26 ccw(c6001.74,3046.74) 6001.74,2940 ; KEY_OK1.1@5926.26,2971.26 ccw(c6001.74,3046.74) 6001.74,2940 ; KEY_OK1.1@5927.71,2929.98 ccw(c5956.6,2921.13) 5935.24,2899.76 ; KEY_OK1.1@5927.71,2929.98 ccw(c5956.6,2921.13) 5935.24,2899.76 ; KEY_OK1.1@5927.71,2929.98 ccw(c5956.6,2921.13) 5935.24,2899.76 ; KEY_OK1.1@5927.71,2929.98 ccw(c5956.6,2921.13) 5935.24,2899.76 ; KEY_OK1.1@5927.71,2929.98 ccw(c5956.6,2921.13) 5935.24,2899.76 ; KEY_OK1.1@5927.71,2929.98 ccw(c5956.6,2921.13) 5935.24,2899.76 ; KEY_OK1.1@5927.71,2929.98 ccw(c5956.6,2921.13) 5935.24,2899.76 ; KEY_OK1.1@5927.71,2929.98 ccw(c5956.6,2921.13) 5935.24,2899.76 ; KEY_OK1.1@5937.27,2927.05 ccw(c5974.61,2915.61) 5947,2888 ; KEY_OK1.1@5937.27,2927.05 ccw(c5974.61,2915.61) 5947,2888 ; KEY_OK1.1@5937.27,2927.05 ccw(c5974.61,2915.61) 5947,2888 ; KEY_OK1.1@5937.27,2927.05 ccw(c5974.61,2915.61) 5947,2888 ; KEY_OK1.1@5937.27,2927.05 ccw(c5974.61,2915.61) 5947,2888 ; KEY_OK1.1@5937.27,2927.05 ccw(c5974.61,2915.61) 5947,2888 ; KEY_OK1.1@5937.27,2927.05 ccw(c5974.61,2915.61) 5947,2888 ; KEY_OK1.1@5937.27,2927.05 ccw(c5974.61,2915.61) 5947,2888 ; R17.1@5939.22,2275.78 ccw(c5920.44,2294.56) 5947,2294.56 ; R17.1@5939.22,2275.78 ccw(c5920.44,2294.56) 5947,2294.56 ; R17.1@5939.22,2275.78 ccw(c5920.44,2294.56) 5947,2294.56 ; R17.1@5939.22,2275.78 ccw(c5920.44,2294.56) 5947,2294.56 ; R17.1@5939.22,2275.78 ccw(c5920.44,2294.56) 5947,2294.56 ; R17.1@5939.22,2275.78 ccw(c5920.44,2294.56) 5947,2294.56 ; R17.1@5939.22,2275.78 ccw(c5920.44,2294.56) 5947,2294.56 ; R17.1@5939.22,2275.78 ccw(c5920.44,2294.56) 5947,2294.56 ; 5947,2294.56 ccw(c5973.56,2294.56) R17.1@5954.78,2275.78 ; 5947,2294.56 ccw(c5973.56,2294.56) R17.1@5954.78,2275.78 ; 5947,2294.56 ccw(c5973.56,2294.56) R17.1@5954.78,2275.78 ; 5947,2294.56 ccw(c5973.56,2294.56) R17.1@5954.78,2275.78 ; 5947,2294.56 ccw(c5973.56,2294.56) R17.1@5954.78,2275.78 ; 5947,2294.56 ccw(c5973.56,2294.56) R17.1@5954.78,2275.78 ; 5947,2294.56 ccw(c5973.56,2294.56) R17.1@5954.78,2275.78 ; 5947,2294.56 ccw(c5973.56,2294.56) R17.1@5954.78,2275.78 ; 6436.19,2940 cw(c6436.19,2816.19) KEY_CANCEL1.1@6523.74,2903.74 ; 6436.19,2940 cw(c6436.19,2816.19) KEY_CANCEL1.1@6523.74,2903.74 ; 6436.19,2940 cw(c6436.19,2816.19) KEY_CANCEL1.1@6523.74,2903.74 ; 6436.19,2940 cw(c6436.19,2816.19) KEY_CANCEL1.1@6523.74,2903.74 ; 6436.19,2940 cw(c6436.19,2816.19) KEY_CANCEL1.1@6523.74,2903.74 ; 6436.19,2940 cw(c6436.19,2816.19) KEY_CANCEL1.1@6523.74,2903.74 ; 6436.19,2940 cw(c6436.19,2816.19) KEY_CANCEL1.1@6523.74,2903.74 ; 6436.19,2940 cw(c6436.19,2816.19) KEY_CANCEL1.1@6523.74,2903.74 ; 6460.33,2940 cw(c6460.33,2840.33) KEY_CANCEL1.1@6530.81,2910.81 ; 6460.33,2940 ccw(c6460.33,3029.67) KEY_CANCEL1.1@6523.74,2966.26 ; 6460.33,2940 ccw(c6460.33,3029.67) KEY_CANCEL1.1@6523.74,2966.26 ; 6460.33,2940 cw(c6460.33,2840.33) KEY_CANCEL1.1@6530.81,2910.81 ; 6460.33,2940 ccw(c6460.33,3029.67) KEY_CANCEL1.1@6523.74,2966.26 ; 6460.33,2940 cw(c6460.33,2840.33) KEY_CANCEL1.1@6530.81,2910.81 ; 6460.33,2940 ccw(c6460.33,3029.67) KEY_CANCEL1.1@6523.74,2966.26 ; 6460.33,2940 cw(c6460.33,2840.33) KEY_CANCEL1.1@6530.81,2910.81 ; 6460.33,2940 ccw(c6460.33,3029.67) KEY_CANCEL1.1@6523.74,2966.26 ; 6460.33,2940 cw(c6460.33,2840.33) KEY_CANCEL1.1@6530.81,2910.81 ; 6460.33,2940 ccw(c6460.33,3029.67) KEY_CANCEL1.1@6523.74,2966.26 ; 6460.33,2940 cw(c6460.33,2840.33) KEY_CANCEL1.1@6530.81,2910.81 ; 6460.33,2940 ccw(c6460.33,3029.67) KEY_CANCEL1.1@6523.74,2966.26 ; 6460.33,2940 cw(c6460.33,2840.33) KEY_CANCEL1.1@6530.81,2910.81 ; 6460.33,2940 ccw(c6460.33,3029.67) KEY_CANCEL1.1@6523.74,2966.26 ; 6460.33,2940 cw(c6460.33,2840.33) KEY_CANCEL1.1@6530.81,2910.81 ; 6484.47,2940 cw(c6484.47,2864.47) KEY_CANCEL1.1@6537.88,2917.88 ; 6484.47,2940 ccw(c6484.47,3005.53) KEY_CANCEL1.1@6530.81,2959.19 ; 6484.47,2940 ccw(c6484.47,3005.53) KEY_CANCEL1.1@6530.81,2959.19 ; 6484.47,2940 cw(c6484.47,2864.47) KEY_CANCEL1.1@6537.88,2917.88 ; 6484.47,2940 ccw(c6484.47,3005.53) KEY_CANCEL1.1@6530.81,2959.19 ; 6484.47,2940 cw(c6484.47,2864.47) KEY_CANCEL1.1@6537.88,2917.88 ; 6484.47,2940 ccw(c6484.47,3005.53) KEY_CANCEL1.1@6530.81,2959.19 ; 6484.47,2940 cw(c6484.47,2864.47) KEY_CANCEL1.1@6537.88,2917.88 ; 6484.47,2940 ccw(c6484.47,3005.53) KEY_CANCEL1.1@6530.81,2959.19 ; 6484.47,2940 cw(c6484.47,2864.47) KEY_CANCEL1.1@6537.88,2917.88 ; 6484.47,2940 ccw(c6484.47,3005.53) KEY_CANCEL1.1@6530.81,2959.19 ; 6484.47,2940 cw(c6484.47,2864.47) KEY_CANCEL1.1@6537.88,2917.88 ; 6484.47,2940 ccw(c6484.47,3005.53) KEY_CANCEL1.1@6530.81,2959.19 ; 6484.47,2940 cw(c6484.47,2864.47) KEY_CANCEL1.1@6537.88,2917.88 ; 6484.47,2940 ccw(c6484.47,3005.53) KEY_CANCEL1.1@6530.81,2959.19 ; 6484.47,2940 cw(c6484.47,2864.47) KEY_CANCEL1.1@6537.88,2917.88
NetMos1_G: Mos1.G R11.1
  other v1: 4403,2918
NetOK1_1: OK1.1 R10.1
  other v1: 4228,2308
NetPW1_1: PW1.1 R2.1 | length 2528.7
  Top Layer w10: PW1.1@4705,2490 v1(4705,2590) ; v1@4701.46,2586.46 cw(c4692.93,2577.93) 4705,2577.93 ; v1@4701.46,2586.46 cw(c4692.93,2577.93) 4705,2577.93 ; v1@4701.46,2586.46 cw(c4692.93,2577.93) 4705,2577.93 ; v1@4701.46,2586.46 cw(c4692.93,2577.93) 4705,2577.93 ; v1@4701.46,2586.46 cw(c4692.93,2577.93) 4705,2577.93 ; v1@4701.46,2586.46 cw(c4692.93,2577.93) 4705,2577.93 ; v1@4701.46,2586.46 cw(c4692.93,2577.93) 4705,2577.93 ; v1@4701.46,2586.46 cw(c4692.93,2577.93) 4705,2577.93 ; v1@4701.46,2586.46 cw(c4692.93,2577.93) 4705,2577.93 ; v1@4701.46,2586.46 cw(c4692.93,2577.93) 4705,2577.93 ; v1@4701.46,2586.46 cw(c4692.93,2577.93) 4705,2577.93 ; v1@4701.46,2586.46 cw(c4692.93,2577.93) 4705,2577.93 ; v1@4701.46,2586.46 cw(c4692.93,2577.93) 4705,2577.93 ; v1@4701.46,2586.46 cw(c4692.93,2577.93) 4705,2577.93 ; v1@4701.46,2586.46 cw(c4692.93,2577.93) 4705,2577.93 ; v1@4701.46,2586.46 cw(c4692.93,2577.93) 4705,2577.93 ; v1@4701.46,2586.46 cw(c4692.93,2577.93) 4705,2577.93 ; v1@4701.46,2586.46 cw(c4692.93,2577.93) 4705,2577.93 ; v1@4701.46,2586.46 cw(c4692.93,2577.93) 4705,2577.93 ; v1@4701.46,2586.46 cw(c4692.93,2577.93) 4705,2577.93 ; v1@4701.46,2586.46 cw(c4692.93,2577.93) 4705,2577.93 ; v1@4701.46,2586.46 cw(c4692.93,2577.93) 4705,2577.93 ; v1@4701.46,2586.46 cw(c4692.93,2577.93) 4705,2577.93 ; v1@4701.46,2586.46 cw(c4692.93,2577.93) 4705,2577.93 ; v1@4701.46,2586.46 cw(c4692.93,2577.93) 4705,2577.93 ; v1@4701.46,2586.46 cw(c4692.93,2577.93) 4705,2577.93 ; v1@4701.46,2586.46 cw(c4692.93,2577.93) 4705,2577.93 ; v1@4701.46,2586.46 cw(c4692.93,2577.93) 4705,2577.93 ; v1@4701.46,2586.46 cw(c4692.93,2577.93) 4705,2577.93 ; v1@4701.46,2586.46 cw(c4692.93,2577.93) 4705,2577.93 ; v1@4701.46,2586.46 cw(c4692.93,2577.93) 4705,2577.93 ; v1@4701.46,2586.46 cw(c4692.93,2577.93) 4705,2577.93 ; v1@4701.46,2586.46 cw(c4692.93,2577.93) 4705,2577.93 ; v1@4701.46,2586.46 cw(c4692.93,2577.93) 4705,2577.93 ; v1@4701.46,2586.46 cw(c4692.93,2577.93) 4705,2577.93 ; v1@4701.46,2586.46 cw(c4692.93,2577.93) 4705,2577.93 ; PW1.1@4705,2512 4705,2550 ; PW1.1@4705,2512 4705,2550 ; PW1.1@4705,2512 4705,2550 ; 4705,2550 v1(4705,2590) ; 4705,2550 v1(4705,2590) ; 4705,2550 v1(4705,2590) ; 4705,2577.93 cw(c4717.07,2577.93) v1@4708.54,2586.46 ; 4705,2577.93 cw(c4717.07,2577.93) v1@4708.54,2586.46 ; 4705,2577.93 cw(c4717.07,2577.93) v1@4708.54,2586.46 ; 4705,2577.93 cw(c4717.07,2577.93) v1@4708.54,2586.46 ; 4705,2577.93 cw(c4717.07,2577.93) v1@4708.54,2586.46 ; 4705,2577.93 cw(c4717.07,2577.93) v1@4708.54,2586.46 ; 4705,2577.93 cw(c4717.07,2577.93) v1@4708.54,2586.46 ; 4705,2577.93 cw(c4717.07,2577.93) v1@4708.54,2586.46 ; 4705,2577.93 cw(c4717.07,2577.93) v1@4708.54,2586.46 ; 4705,2577.93 cw(c4717.07,2577.93) v1@4708.54,2586.46 ; 4705,2577.93 cw(c4717.07,2577.93) v1@4708.54,2586.46 ; 4705,2577.93 cw(c4717.07,2577.93) v1@4708.54,2586.46 ; 4705,2577.93 cw(c4717.07,2577.93) v1@4708.54,2586.46 ; 4705,2577.93 cw(c4717.07,2577.93) v1@4708.54,2586.46 ; 4705,2577.93 cw(c4717.07,2577.93) v1@4708.54,2586.46 ; 4705,2577.93 cw(c4717.07,2577.93) v1@4708.54,2586.46 ; 4705,2577.93 cw(c4717.07,2577.93) v1@4708.54,2586.46 ; 4705,2577.93 cw(c4717.07,2577.93) v1@4708.54,2586.46 ; 4705,2577.93 cw(c4717.07,2577.93) v1@4708.54,2586.46 ; 4705,2577.93 cw(c4717.07,2577.93) v1@4708.54,2586.46 ; 4705,2577.93 cw(c4717.07,2577.93) v1@4708.54,2586.46 ; 4705,2577.93 cw(c4717.07,2577.93) v1@4708.54,2586.46 ; 4705,2577.93 cw(c4717.07,2577.93) v1@4708.54,2586.46 ; 4705,2577.93 cw(c4717.07,2577.93) v1@4708.54,2586.46 ; 4705,2577.93 cw(c4717.07,2577.93) v1@4708.54,2586.46 ; 4705,2577.93 cw(c4717.07,2577.93) v1@4708.54,2586.46 ; 4705,2577.93 cw(c4717.07,2577.93) v1@4708.54,2586.46 ; 4705,2577.93 cw(c4717.07,2577.93) v1@4708.54,2586.46 ; 4705,2577.93 cw(c4717.07,2577.93) v1@4708.54,2586.46 ; 4705,2577.93 cw(c4717.07,2577.93) v1@4708.54,2586.46 ; 4705,2577.93 cw(c4717.07,2577.93) v1@4708.54,2586.46 ; 4705,2577.93 cw(c4717.07,2577.93) v1@4708.54,2586.46 ; 4705,2577.93 cw(c4717.07,2577.93) v1@4708.54,2586.46 ; 4705,2577.93 cw(c4717.07,2577.93) v1@4708.54,2586.46 ; 4705,2577.93 cw(c4717.07,2577.93) v1@4708.54,2586.46 ; 4705,2577.93 cw(c4717.07,2577.93) v1@4708.54,2586.46
  Bottom Layer w10: R2.1@4403,2768 4581,2590 v1(4705,2590) ; R2.1@4403,2757 cw(c4403,2730.44) 4421.78,2749.22 ; R2.1@4403,2757 cw(c4403,2730.44) 4421.78,2749.22 ; R2.1@4403,2757 cw(c4403,2730.44) 4421.78,2749.22 ; R2.1@4403,2757 cw(c4403,2730.44) 4421.78,2749.22 ; R2.1@4403,2757 cw(c4403,2730.44) 4421.78,2749.22 ; R2.1@4403,2757 cw(c4403,2730.44) 4421.78,2749.22 ; R2.1@4403,2757 cw(c4403,2730.44) 4421.78,2749.22 ; R2.1@4403,2757 cw(c4403,2730.44) 4421.78,2749.22 ; R2.1@4414,2768 ccw(c4440.56,2768) 4421.78,2749.22 ; R2.1@4414,2768 ccw(c4440.56,2768) 4421.78,2749.22 ; R2.1@4414,2768 ccw(c4440.56,2768) 4421.78,2749.22 ; R2.1@4414,2768 ccw(c4440.56,2768) 4421.78,2749.22 ; R2.1@4414,2768 ccw(c4440.56,2768) 4421.78,2749.22 ; R2.1@4414,2768 ccw(c4440.56,2768) 4421.78,2749.22 ; R2.1@4414,2768 ccw(c4440.56,2768) 4421.78,2749.22 ; R2.1@4414,2768 ccw(c4440.56,2768) 4421.78,2749.22 ; 4665,2590 v1(4705,2590) ; 4665,2590 v1(4705,2590) ; 4665,2590 v1(4705,2590) ; 4692.93,2590 cw(c4692.93,2577.93) v1@4701.46,2586.46 ; 4692.93,2590 ccw(c4692.93,2602.07) v1@4701.46,2593.54 ; 4692.93,2590 cw(c4692.93,2577.93) v1@4701.46,2586.46 ; 4692.93,2590 ccw(c4692.93,2602.07) v1@4701.46,2593.54 ; 4692.93,2590 cw(c4692.93,2577.93) v1@4701.46,2586.46 ; 4692.93,2590 ccw(c4692.93,2602.07) v1@4701.46,2593.54 ; 4692.93,2590 cw(c4692.93,2577.93) v1@4701.46,2586.46 ; 4692.93,2590 ccw(c4692.93,2602.07) v1@4701.46,2593.54 ; 4692.93,2590 ccw(c4692.93,2602.07) v1@4701.46,2593.54 ; 4692.93,2590 cw(c4692.93,2577.93) v1@4701.46,2586.46 ; 4692.93,2590 ccw(c4692.93,2602.07) v1@4701.46,2593.54 ; 4692.93,2590 cw(c4692.93,2577.93) v1@4701.46,2586.46 ; 4692.93,2590 ccw(c4692.93,2602.07) v1@4701.46,2593.54 ; 4692.93,2590 cw(c4692.93,2577.93) v1@4701.46,2586.46 ; 4692.93,2590 ccw(c4692.93,2602.07) v1@4701.46,2593.54 ; 4692.93,2590 cw(c4692.93,2577.93) v1@4701.46,2586.46 ; 4692.93,2590 ccw(c4692.93,2602.07) v1@4701.46,2593.54 ; 4692.93,2590 cw(c4692.93,2577.93) v1@4701.46,2586.46 ; 4692.93,2590 ccw(c4692.93,2602.07) v1@4701.46,2593.54 ; 4692.93,2590 cw(c4692.93,2577.93) v1@4701.46,2586.46 ; 4692.93,2590 ccw(c4692.93,2602.07) v1@4701.46,2593.54 ; 4692.93,2590 cw(c4692.93,2577.93) v1@4701.46,2586.46 ; 4692.93,2590 ccw(c4692.93,2602.07) v1@4701.46,2593.54 ; 4692.93,2590 cw(c4692.93,2577.93) v1@4701.46,2586.46 ; 4692.93,2590 ccw(c4692.93,2602.07) v1@4701.46,2593.54 ; 4692.93,2590 cw(c4692.93,2577.93) v1@4701.46,2586.46 ; 4692.93,2590 ccw(c4692.93,2602.07) v1@4701.46,2593.54 ; 4692.93,2590 cw(c4692.93,2577.93) v1@4701.46,2586.46 ; 4692.93,2590 ccw(c4692.93,2602.07) v1@4701.46,2593.54 ; 4692.93,2590 cw(c4692.93,2577.93) v1@4701.46,2586.46 ; 4692.93,2590 ccw(c4692.93,2602.07) v1@4701.46,2593.54 ; 4692.93,2590 cw(c4692.93,2577.93) v1@4701.46,2586.46 ; 4692.93,2590 ccw(c4692.93,2602.07) v1@4701.46,2593.54 ; 4692.93,2590 cw(c4692.93,2577.93) v1@4701.46,2586.46 ; 4692.93,2590 ccw(c4692.93,2602.07) v1@4701.46,2593.54 ; 4692.93,2590 cw(c4692.93,2577.93) v1@4701.46,2586.46 ; 4692.93,2590 ccw(c4692.93,2602.07) v1@4701.46,2593.54 ; 4692.93,2590 cw(c4692.93,2577.93) v1@4701.46,2586.46 ; 4692.93,2590 ccw(c4692.93,2602.07) v1@4701.46,2593.54 ; 4692.93,2590 cw(c4692.93,2577.93) v1@4701.46,2586.46 ; 4692.93,2590 ccw(c4692.93,2602.07) v1@4701.46,2593.54 ; 4692.93,2590 cw(c4692.93,2577.93) v1@4701.46,2586.46 ; 4692.93,2590 ccw(c4692.93,2602.07) v1@4701.46,2593.54 ; 4692.93,2590 cw(c4692.93,2577.93) v1@4701.46,2586.46 ; 4692.93,2590 ccw(c4692.93,2602.07) v1@4701.46,2593.54 ; 4692.93,2590 cw(c4692.93,2577.93) v1@4701.46,2586.46 ; 4692.93,2590 ccw(c4692.93,2602.07) v1@4701.46,2593.54 ; 4692.93,2590 cw(c4692.93,2577.93) v1@4701.46,2586.46 ; 4692.93,2590 ccw(c4692.93,2602.07) v1@4701.46,2593.54 ; 4692.93,2590 cw(c4692.93,2577.93) v1@4701.46,2586.46 ; 4692.93,2590 ccw(c4692.93,2602.07) v1@4701.46,2593.54 ; 4692.93,2590 cw(c4692.93,2577.93) v1@4701.46,2586.46 ; 4692.93,2590 ccw(c4692.93,2602.07) v1@4701.46,2593.54 ; 4692.93,2590 cw(c4692.93,2577.93) v1@4701.46,2586.46 ; 4692.93,2590 ccw(c4692.93,2602.07) v1@4701.46,2593.54 ; 4692.93,2590 cw(c4692.93,2577.93) v1@4701.46,2586.46 ; 4692.93,2590 ccw(c4692.93,2602.07) v1@4701.46,2593.54 ; 4692.93,2590 cw(c4692.93,2577.93) v1@4701.46,2586.46 ; 4692.93,2590 ccw(c4692.93,2602.07) v1@4701.46,2593.54 ; 4692.93,2590 cw(c4692.93,2577.93) v1@4701.46,2586.46 ; 4692.93,2590 ccw(c4692.93,2602.07) v1@4701.46,2593.54 ; 4692.93,2590 cw(c4692.93,2577.93) v1@4701.46,2586.46 ; 4692.93,2590 ccw(c4692.93,2602.07) v1@4701.46,2593.54 ; 4692.93,2590 cw(c4692.93,2577.93) v1@4701.46,2586.46 ; 4692.93,2590 ccw(c4692.93,2602.07) v1@4701.46,2593.54 ; 4692.93,2590 cw(c4692.93,2577.93) v1@4701.46,2586.46 ; 4692.93,2590 ccw(c4692.93,2602.07) v1@4701.46,2593.54 ; 4692.93,2590 cw(c4692.93,2577.93) v1@4701.46,2586.46 ; 4692.93,2590 ccw(c4692.93,2602.07) v1@4701.46,2593.54 ; 4692.93,2590 cw(c4692.93,2577.93) v1@4701.46,2586.46 ; 4692.93,2590 ccw(c4692.93,2602.07) v1@4701.46,2593.54 ; 4692.93,2590 cw(c4692.93,2577.93) v1@4701.46,2586.46